# EAGLE board TIMMER (EAGLE 9.6.2)
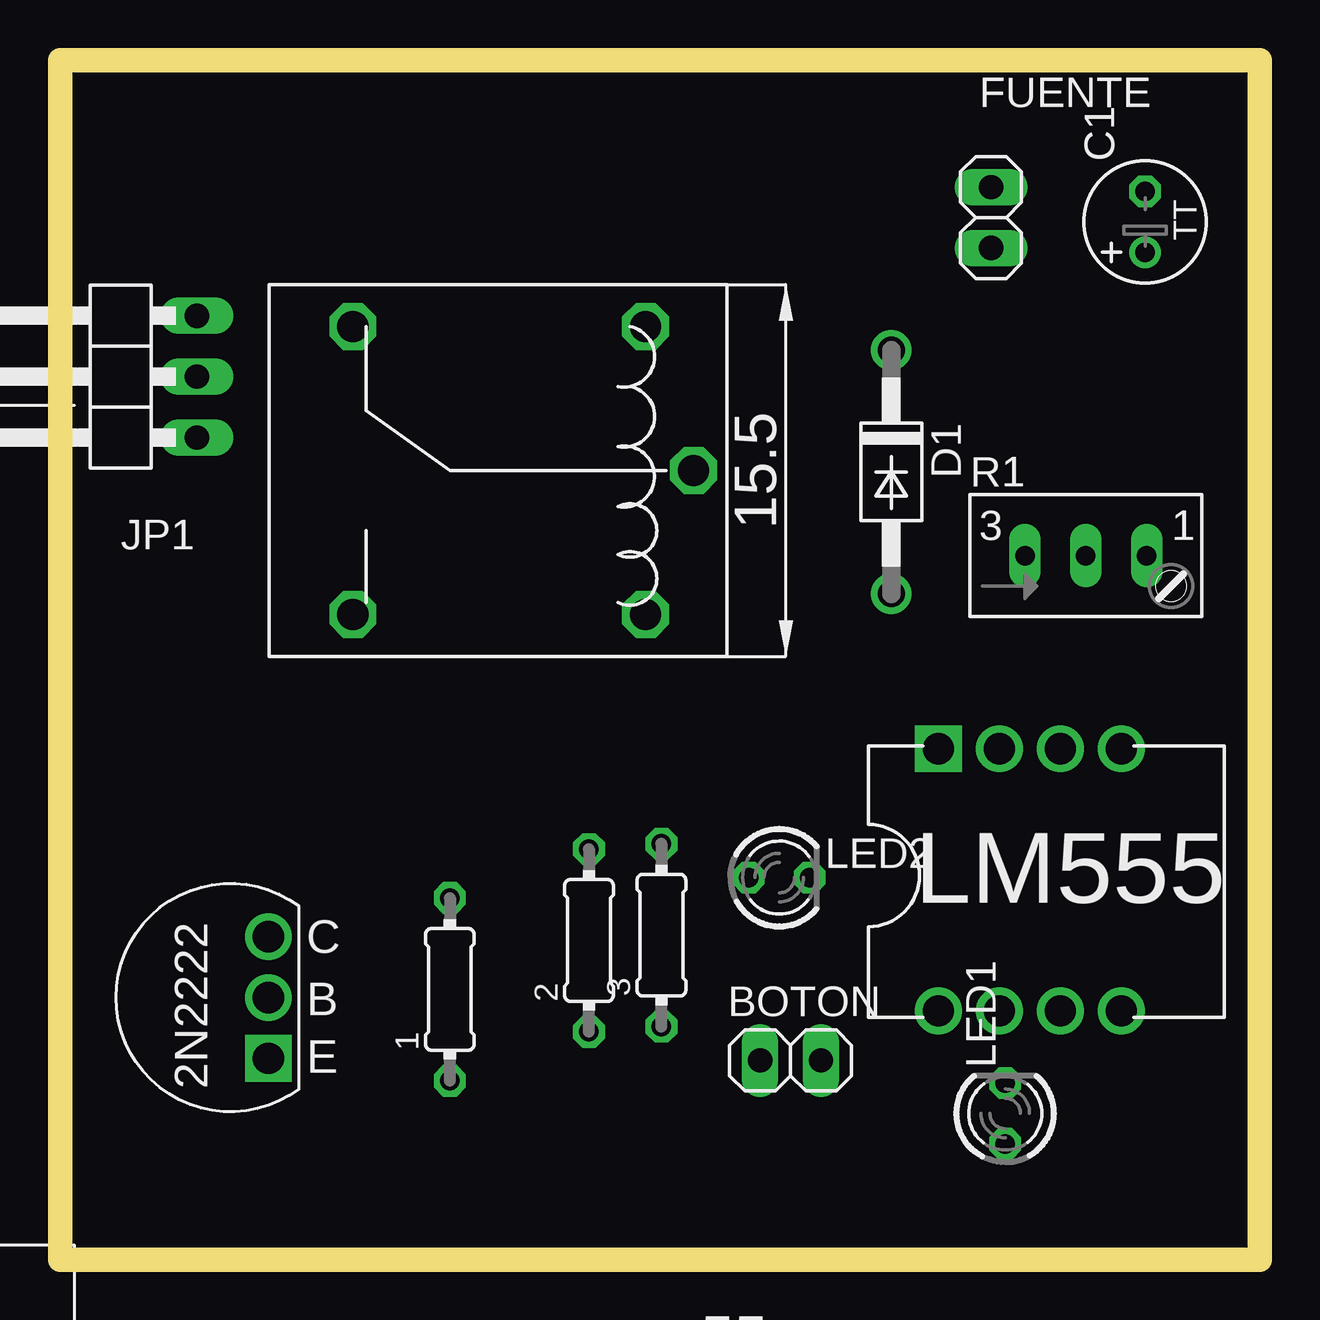
[diagram p0: board, top side]
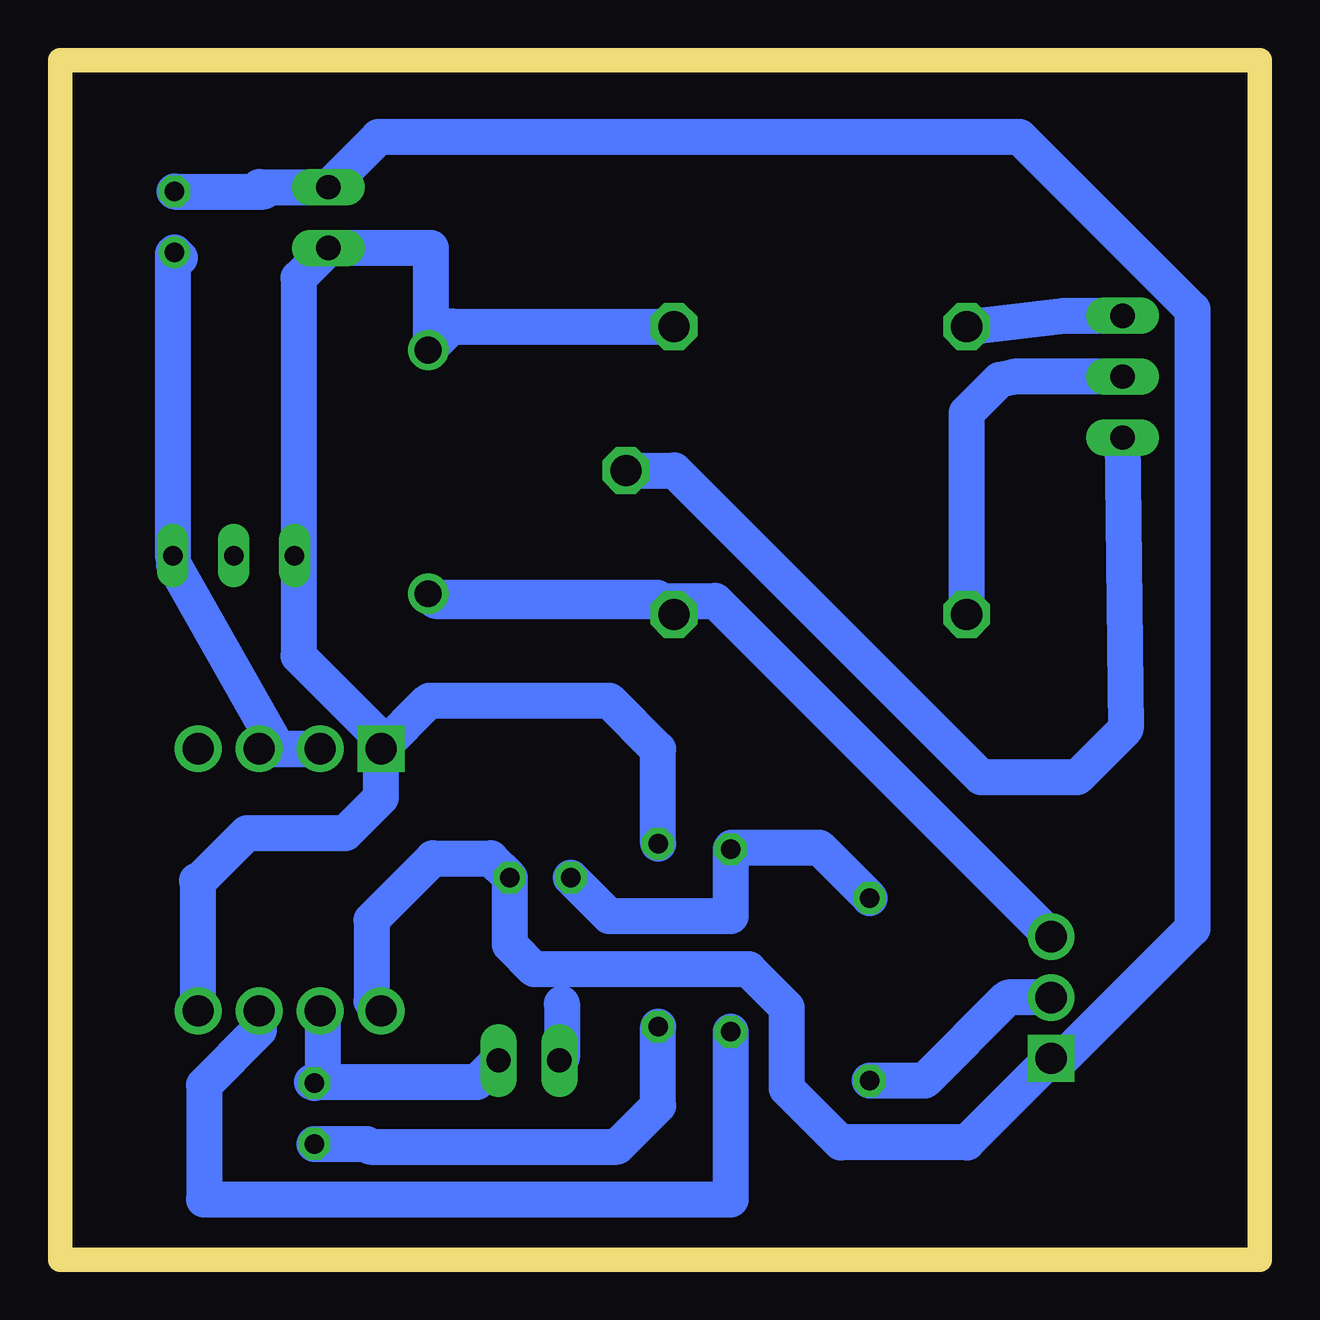
[diagram p1: board, bottom side, seen from below]

Size 50 x 50 mm. Coordinates in mm from the lower left corner, seen from the top.
Outline: 0,50 0,0 50,0 50,50 0,50
Copper layers (1*16): Top 0.035mm / dielectric 1.5mm / Bottom 0.035mm
Design rules "default": minimum track width 6mil, minimum drill 0.35mm, track to track 6mil, track to pad 6mil, pad to pad 6mil, via to via 6mil, smd to smd 6mil, copper to edge 40mil, drill to drill 6mil, minimum pad ring 10mil, minimum via ring 8mil, stop-mask expansion 4mil, vias tented up to drill 0mil, thermal gap 10mil

## Footprints (pad centres in the part's own frame; a part is rotated, then mirrored left to right if it is on the bottom)
0204/7 = drill 0.813 octagon: 1 -3.81,0; 2 3.81,0
1X02 = drill 1.016 long: 1 -1.27,0; 2 1.27,0
TT2D5 = drill 0.813: + -1.27,0 | drill 0.813 octagon: - 1.27,0
DO41-10 = drill 1.118: A 5.08,0; C -5.08,0
1X03/90 = drill 1.016 long: 1 -2.54,-3.81; 2 0,-3.81; 3 2.54,-3.81
LED3MM = drill 0.813 octagon: A -1.27,0; K 1.27,0
S64W = drill 0.813 long: A 2.54,1.27; E -2.54,1.27; S 0,1.27
2N2222 = drill 1.3: B 0,0; C 2.54,0 | drill 1.3 square: E -2.54,0
555 = drill 1.3: CONTROL-V 7.62,10.92; DISCHARGE 2.54,10.92; GND 0,0; OUTPUT 5.08,0; RESET 7.62,0; THRESHOLD 5.08,10.92; TRIGGER 2.54,0 | drill 1.3 square: VCC 0,10.92
RELEY = drill 1.3 octagon: B1 6,6.15; B2 -6,6.15; IN 0,8.15; NA 6,-6.05; NC -6,-6.05

## Placement (x,y rotation side)
1  1k  [0204/7]  16.25,11.26 90 top
2  1k  [0204/7]  22.05,13.3 90 top
3  1k  [0204/7]  25.07,13.52 90 top
BOTON  [1X02]  30.45,8.3 0 top
C1  [TT2D5]  45.23,43.25 90 top
D1  1N4004  [DO41-10]  34.65,32.83 270 top
FUENTE  [1X02]  38.81,43.43 90 top
JP1  [1X03/90]  1.9,36.8 90 top
LED1  [LED3MM]  39.4,6.09 90 top
LED2  [LED3MM]  29.98,15.92 0 top
R1  [S64W]  42.76,28.07 0 top
U$1  2N2222  [2N2222]  8.69,10.92 90 top
U$2  555  [555]  36.62,10.37 0 top
U$3  RELEY  [RELEY]  18.26,32.89 270 top

## Library data of the parts
1-3 = rcl; SPICEPREFIX: R
BOTON FUENTE JP1 = pinhead
C1 = rcl; SPICEPREFIX: C
D1 = diode
LED1 LED2 = led
R1 = pot
U$1-U$3 = MODULAR

## Nets
GND: BOTON.1 C1.- FUENTE.2 LED2.K U$1.E U$2.GND
N$1: D1.A U$1.C U$3.B1
N$2: JP1.1 U$3.IN
N$3: JP1.2 U$3.NA
N$4: 1.1 U$1.B
N$5: 1.2 2.2 LED2.A
N$6: 2.1 U$2.OUTPUT
N$7: BOTON.2 LED1.K U$2.TRIGGER
N$8: 3.1 LED1.A
N$9: JP1.3 U$3.NC
N$10: C1.+ R1.A U$2.DISCHARGE U$2.THRESHOLD
VCC: 3.2 D1.C FUENTE.1 U$2.RESET U$2.VCC U$3.B2

## Tracks (layer width: path | path; a pad name or v marks a point on that pad's centre or on a via)
GND
  Bottom 1.5: C1.- 41.49,44.52 41.7,44.7 FUENTE.2 36.72,46.79 9.99,46.79 2.8,39.6 2.8,13.8 8.22,8.38 U$1.E 12.19,4.88 17.46,4.88 19.7,7.12 19.7,10.5 21.3,12.1 30.23,12.1 31.25,13.12 LED2.K 32.05,16.72 34.45,16.72 37.02,14.15 37.02,10.77 U$2.GND | BOTON.1 29.08,8.4 29.08,10.67
N$1
  Bottom 1.5: U$3.B1 25.11,27.59 34.49,27.59 D1.A 34.35,27.45 22.68,27.45 U$1.C
N$2
  Bottom 1.5: JP1.1 5.58,22.12 7.6,20.1 11.6,20.1 24.39,32.89 U$3.IN
N$3
  Bottom 1.5: JP1.2 10.24,36.8 10.82,36.68 12.21,35.29 U$3.NA
N$4
  Bottom 1.5: U$1.B 10.48,10.92 13.95,7.45 1.1
N$5
  Bottom 1.5: 1.2 18.35,17.17 21.99,17.17 2.2 22.05,14.32 27.11,14.32 LED2.A
N$6
  Bottom 1.5: 2.1 22.05,2.5 44,2.5 44,7.27 41.7,9.57 U$2.OUTPUT
N$7
  Bottom 1.5: BOTON.2 32.62,7.4 39.5,7.4 LED1.K 39.06,7.7 39.06,10.27 U$2.TRIGGER
N$8
  Bottom 1.5: LED1.A 37.2,4.82 37.08,4.7 26.78,4.7 25.07,6.41 3.1
N$9
  Bottom 1.5: 12.31,38.79 U$3.NC 11.7,38.89 11.68,38.93 8.16,39.34 JP1.3
N$10
  Bottom 1.5: U$2.THRESHOLD U$2.DISCHARGE 40.9,21.29 45.26,28.96 | R1.A 45.3,41.91 C1.+ 45,41.75
VCC
  Bottom 1.5: U$3.B2 33.67,38.89 D1.C 34.55,38.02 34.55,42.16 FUENTE.1 | U$2.RESET 44.24,15.74 | 44.24,15.74 44.3,15.8 | 44.24,15.74 42.2,17.78 38.1,17.78 36.62,19.26 U$2.VCC 34.61,23.3 27.1,23.3 25.07,21.27 3.2 | FUENTE.1 38.94,42.03 | FUENTE.1 40.06,40.91 40.06,25.16 36.68,21.78